# EAGLE board MGC3130_Board (EAGLE 6.3)
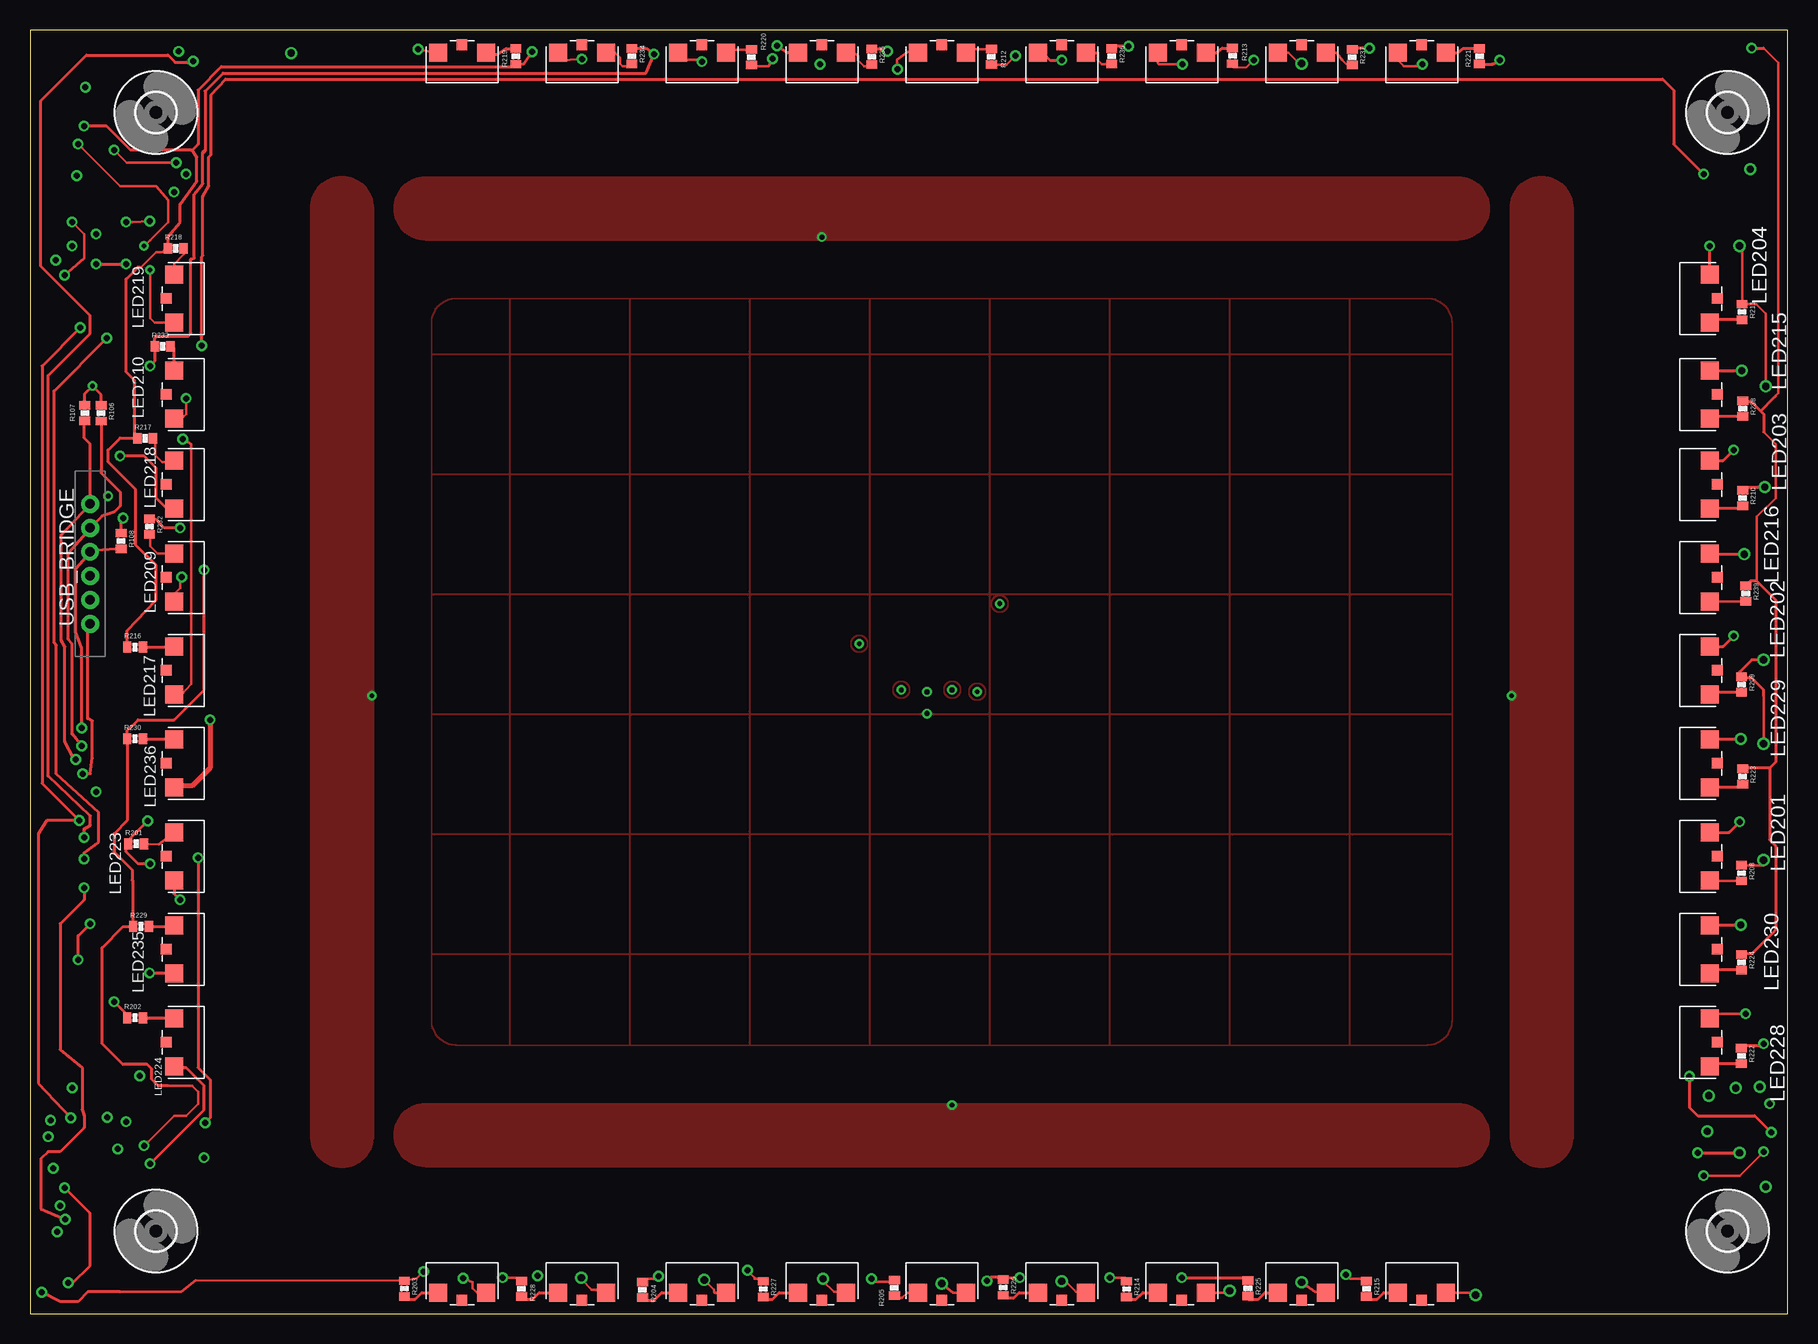
[diagram p0: board, top side]
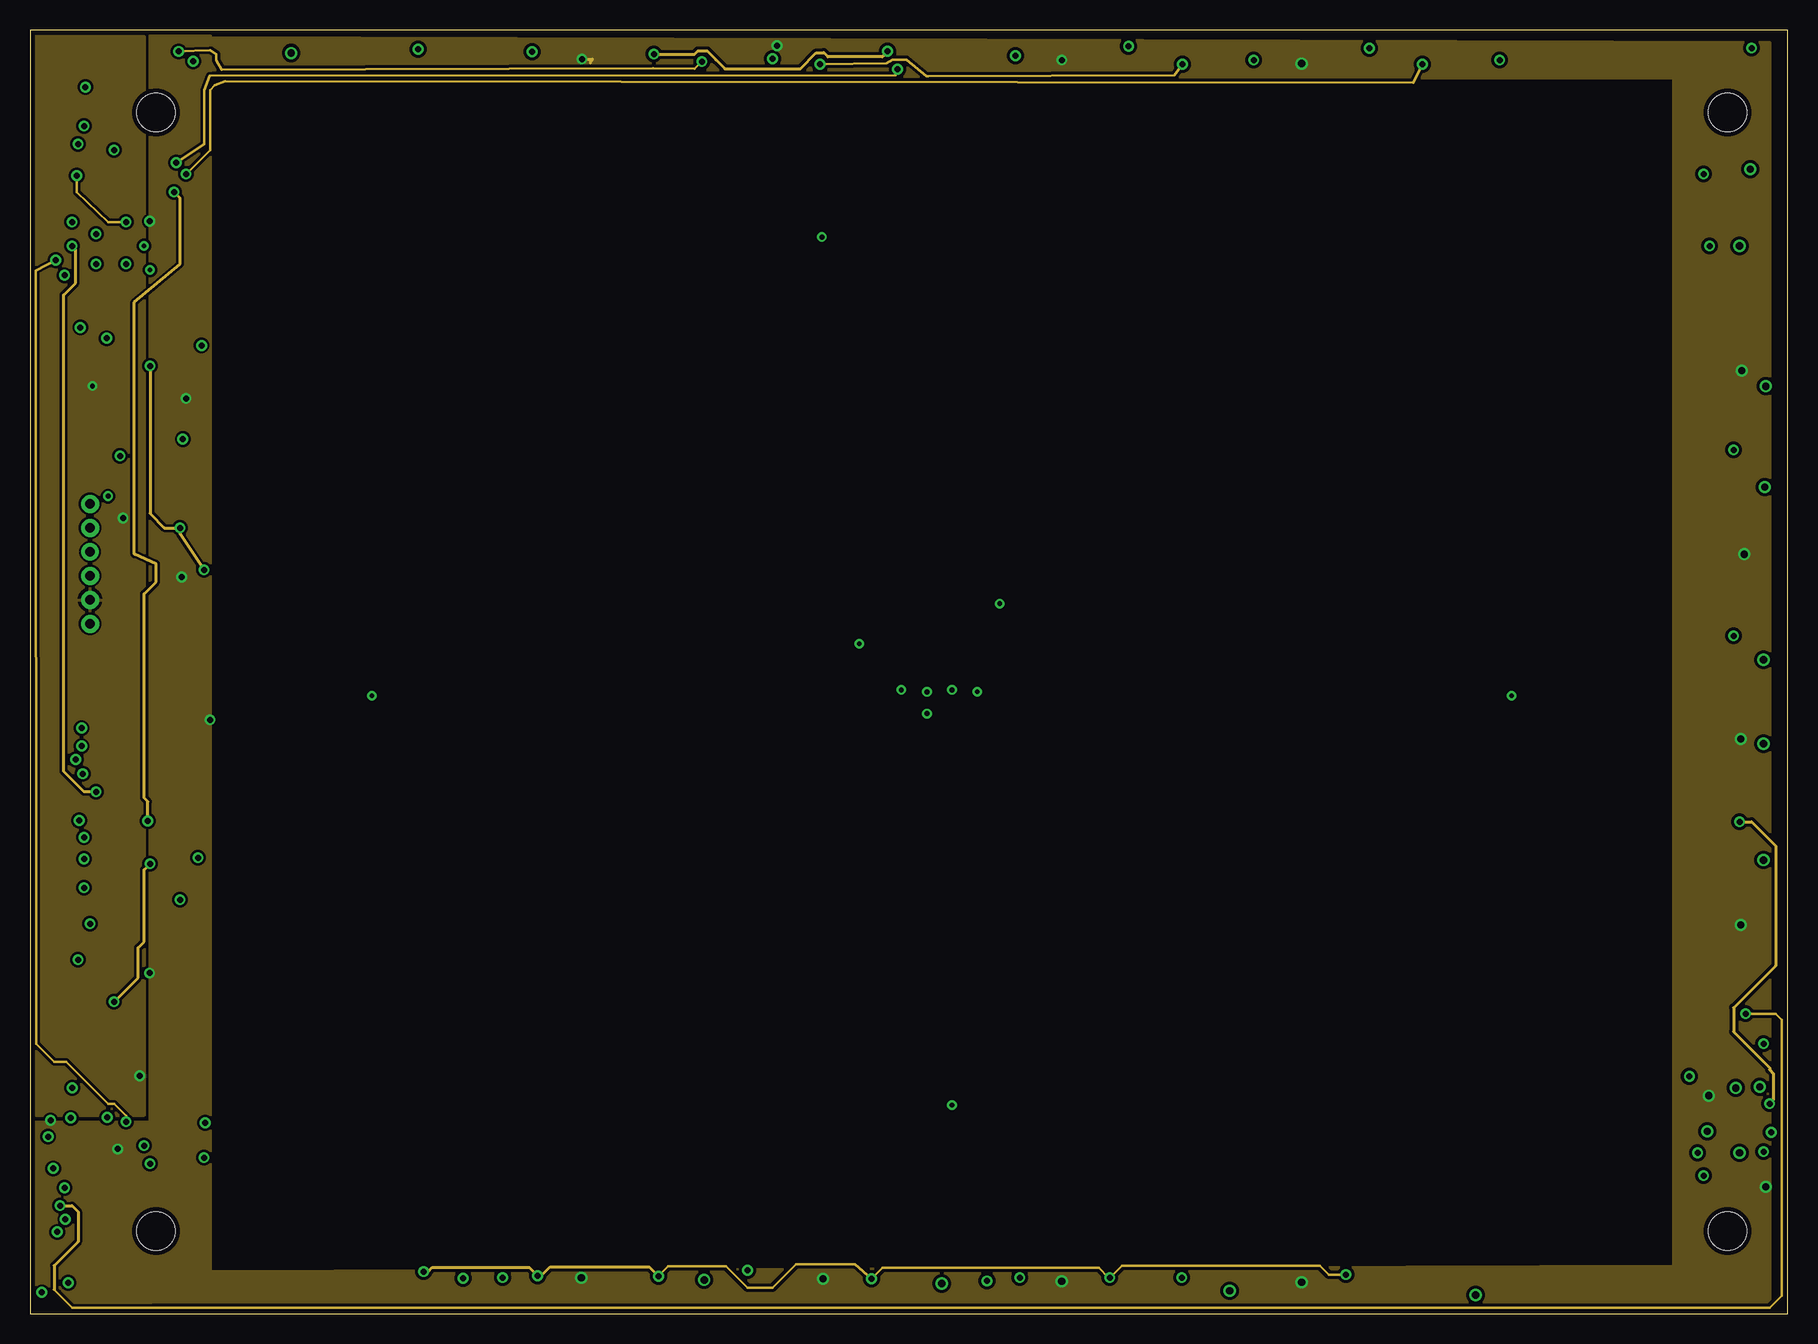
[diagram p1: board, inner layer Route2]
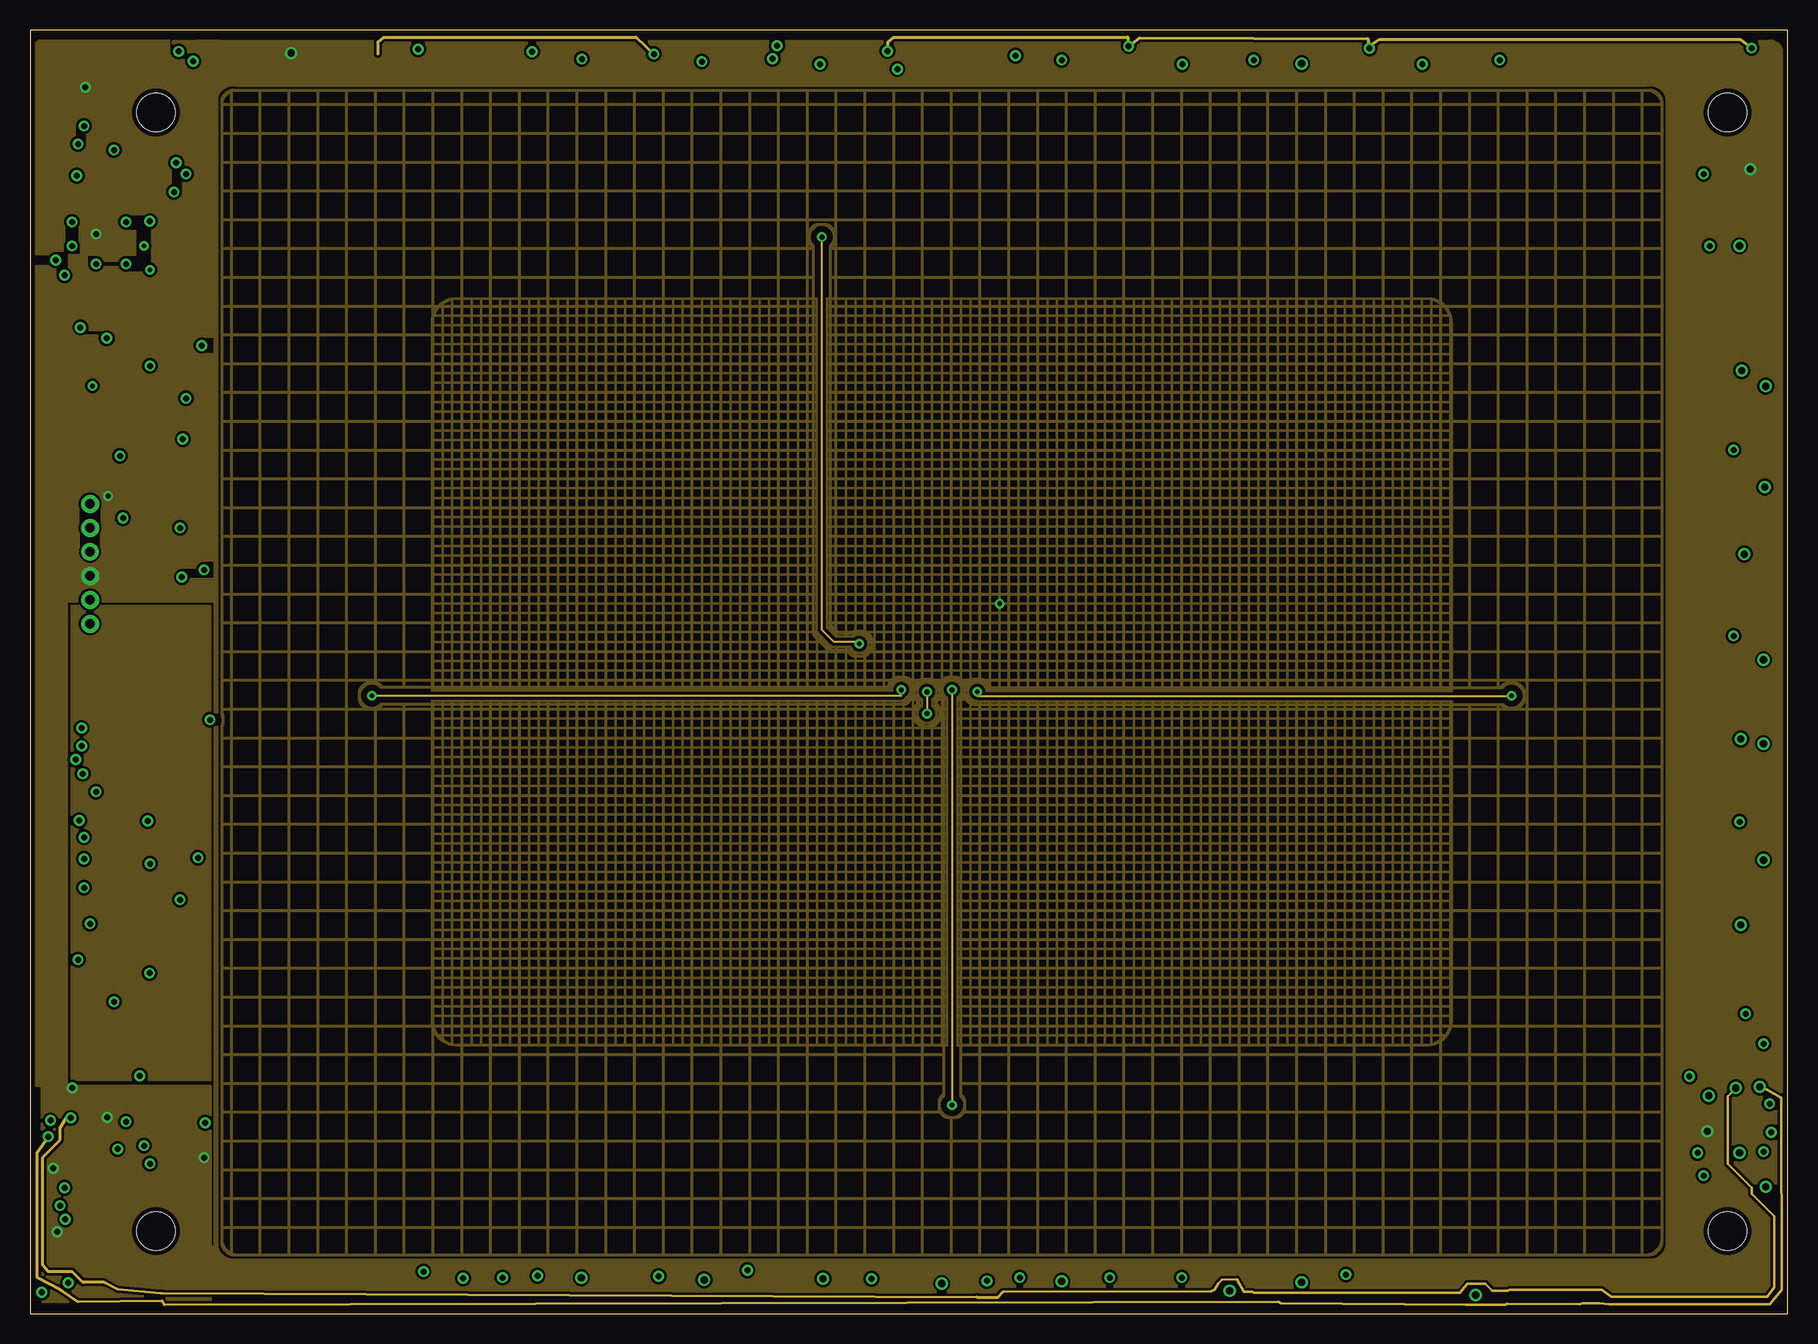
[diagram p2: board, inner layer Route15]
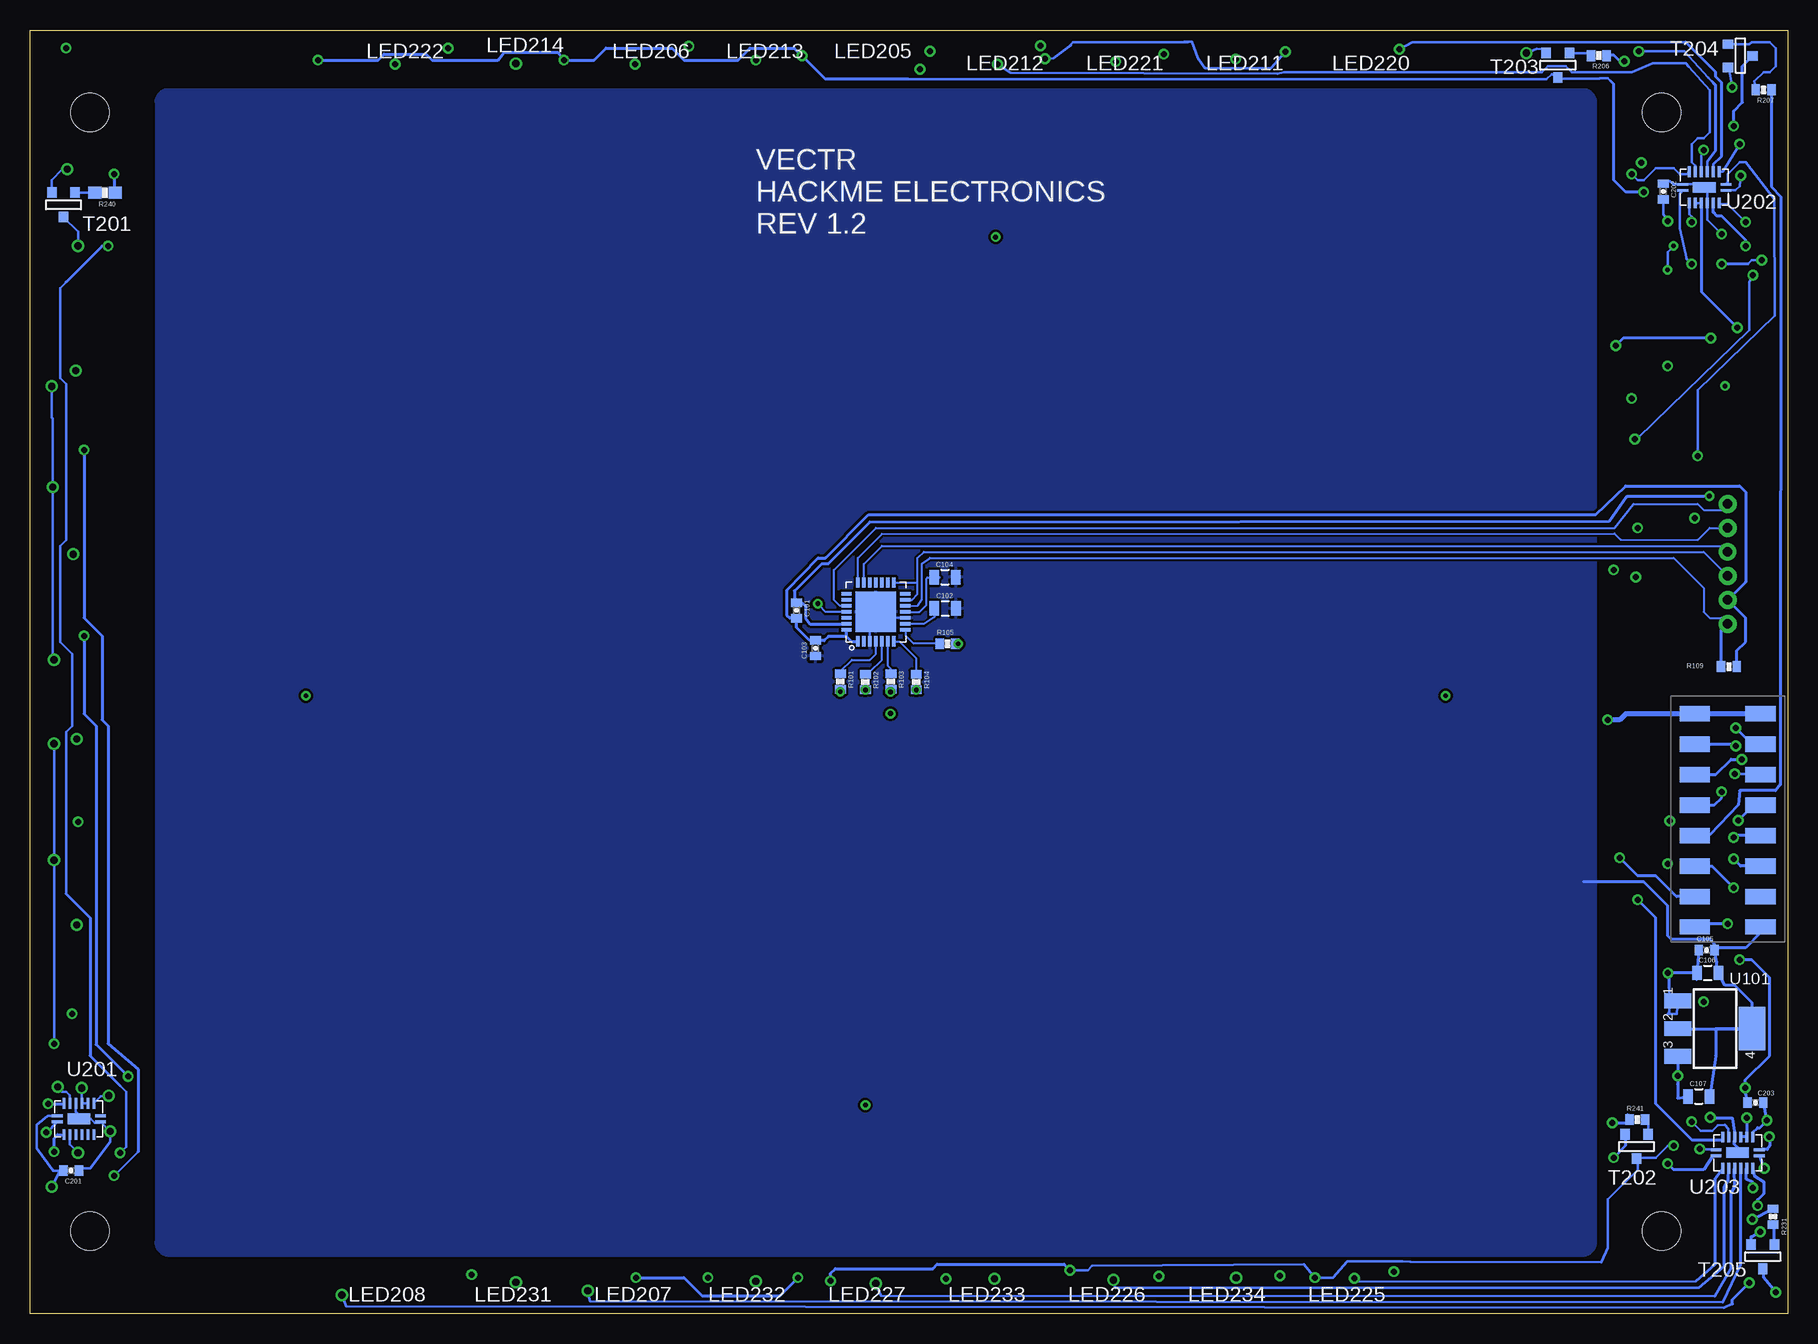
[diagram p3: board, bottom side, seen from below]

Size 146.5 x 107 mm. Coordinates in mm from the lower left corner, seen from the top.
Outline: 0,0 146.5,0 146.5,107 0,107 0,0
Copper layers (1*2+15*16): Top 0.035mm / dielectric 1.5mm / Route2 0.035mm / dielectric 1.5mm / Route15 0.035mm / dielectric 0.2mm / Bottom 0.035mm
Design rules "default *": minimum track width 0.14mm, minimum drill 12mil, track to track 8mil, track to pad 8mil, pad to pad 8mil, via to via 8mil, smd to smd 8mil, copper to edge 15mil, drill to drill 8mil, minimum pad ring 10mil, minimum via ring 8mil, stop-mask expansion 4mil, vias tented up to drill 0.45mm, thermal gap 10mil

## Footprints (pad centres in the part's own frame; a part is rotated, then mirrored left to right if it is on the bottom)
0402-CAP = smd 0.7 x 0.9: 1 -0.65,0; 2 0.65,0
0805 = smd 0.8 x 1.2: 1 -0.9,0; 2 0.9,0
APA3010 = smd 1.5 x 1.5: P$1 2,0; P$2 -2,0 | smd 0.9 x 0.9: P$3 0,0.65
0402-RES = smd 0.7 x 0.9: 1 -0.65,0; 2 0.65,0
0603-RES = smd 1.1 x 1: 1 -0.85,0; 2 0.85,0
SOT-23 = smd 0.787 x 0.889: 1 0.025,-1.016; 2 -0.94,1.016; 3 0.991,1.016
16-SMT = smd 1.27 x 2.54: P$1 0,-2.73; P$2 0,2.73; P$3 2.54,-2.73; P$4 2.54,2.73; P$5 5.08,-2.73; P$6 5.08,2.73; P$7 7.62,-2.73; P$8 7.62,2.73; P$9 10.16,-2.73; P$10 10.16,2.73; P$11 12.7,-2.73; P$12 12.7,2.73; P$13 15.24,-2.73; P$14 15.24,2.73; P$15 17.78,-2.73; P$16 17.78,2.73
SOT223 = smd 1.219 x 2.235: 1 -2.311,-3.099; 2 0,-3.099; 3 2.311,-3.099 | smd 3.6 x 2.2: 4 0,3.099
QFN28 = smd 0.85 x 0.3: P$1 -2.45,1.5; P$2 -2.45,1; P$3 -2.45,0.5; P$4 -2.45,0; P$5 -2.45,-0.5; P$6 -2.45,-1; P$7 -2.45,-1.5; P$15 2.45,-1.5; P$16 2.45,-1; P$17 2.45,-0.5; P$18 2.45,0; P$19 2.45,0.5; P$20 2.45,1; P$21 2.45,1.5 | smd 0.3 x 0.85: P$8 -1.5,-2.45; P$9 -1,-2.45; P$10 -0.5,-2.45; P$11 0,-2.45; P$12 0.5,-2.45; P$13 1,-2.45; P$14 1.5,-2.45; P$22 1.5,2.45; P$23 1,2.45; P$24 0.5,2.45; P$25 0,2.45; P$26 -0.5,2.45; P$27 -1,2.45; P$28 -1.5,2.45 | smd 3.35 x 3.35: P$29 0,0
DHVQFN16 = smd 0.9 x 0.24: 1 -1.8,-0.25; 8 1.8,-0.25; 9 1.8,0.25; 16 -1.8,0.25 | smd 0.24 x 0.9: 2 -1.25,-1.3; 3 -0.75,-1.3; 4 -0.25,-1.3; 5 0.25,-1.3; 6 0.75,-1.3; 7 1.25,-1.3; 10 1.25,1.3; 11 0.75,1.3; 12 0.25,1.3; 13 -0.25,1.3; 14 -0.75,1.3; 15 -1.25,1.3 | smd 1.9 x 0.9: PAD 0,0
3,2 = hole 3.2: 0,0
1X6_2MM_HEADER = drill 0.8 pad 1.5: 1 -5,0; 2 -3,0; 3 -1,0; 5 3,0; 6 5,0 | drill 0.8 pad 1.422: 4 1,0

## Placement (x,y rotation side)
C101  .1uF  [0402-CAP]  82.6,58.61 270 bottom
C102  4.7uF  [0805]  70.21,58.78 0 bottom
C103  .1uF  [0402-CAP]  81.03,55.46 90 bottom
C104  4.7uF  [0805]  70.23,61.38 0 bottom
C105  .1uF  [0402-CAP]  6.75,30.3 180 bottom
C106  4.7uF  [0805]  6.65,28.4 0 bottom
C107  4.7uF  [0805]  7.4,18.1 0 bottom
C201  .1uF  [0402-CAP]  143.07,11.91 180 bottom
C202  .1uF  [0402-CAP]  10.36,93.54 270 bottom
C203  .1uF  [0402-CAP]  2.67,17.58 0 bottom
LED201  APA3010QBC/D-GX  [APA3010]  140,38.12 270 top
LED202  APA3010QBC/D-GX  [APA3010]  140,53.62 270 top
LED203  APA3010QBC/D-GX  [APA3010]  140,69.12 270 top
LED204  APA3010QBC/D-GX  [APA3010]  140,84.62 270 top
LED205  APA3010QBC/D-GX  [APA3010]  76,105.12 0 top
LED206  APA3010QBC/D-GX  [APA3010]  96,105.12 0 top
LED207  APA3010QBC/D-GX  [APA3010]  96,1.75 180 top
LED208  APA3010QBC/D-GX  [APA3010]  116,1.75 180 top
LED209  APA3010SRCPRV-GX  [APA3010]  12,61.38 90 top
LED210  APA3010SRCPRV-GX  [APA3010]  12,76.62 90 top
LED211  APA3010SRCPRV-GX  [APA3010]  46,105.12 0 top
LED212  APA3010SRCPRV-GX  [APA3010]  66,105.12 0 top
LED213  APA3010SRCPRV-GX  [APA3010]  86,105.12 0 top
LED214  APA3010SRCPRV-GX  [APA3010]  106,105.12 0 top
LED215  APA3010SRCPRV-GX  [APA3010]  140,76.62 270 top
LED216  APA3010SRCPRV-GX  [APA3010]  140,61.38 270 top
LED217  APA3010QBC/D-GX  [APA3010]  12,53.62 90 top
LED218  APA3010QBC/D-GX  [APA3010]  12,69.12 90 top
LED219  APA3010QBC/D-GX  [APA3010]  12,84.62 90 top
LED220  APA3010QBC/D-GX  [APA3010]  36,105.12 0 top
LED221  APA3010QBC/D-GX  [APA3010]  56,105.12 0 top
LED222  APA3010QBC/D-GX  [APA3010]  116,105.12 0 top
LED223  APA3010QBC/D-GX  [APA3010]  12,38.12 90 top
LED224  APA3010QBC/D-GX  [APA3010]  12,22.62 90 top
LED225  APA3010QBC/D-GX  [APA3010]  36,1.75 180 top
LED226  APA3010QBC/D-GX  [APA3010]  56,1.75 180 top
LED227  APA3010QBC/D-GX  [APA3010]  76,1.75 180 top
LED228  APA3010QBC/D-GX  [APA3010]  140,22.62 270 top
LED229  APA3010SRCPRV-GX  [APA3010]  140,45.88 270 top
LED230  APA3010SRCPRV-GX  [APA3010]  140,30.38 270 top
LED231  APA3010SRCPRV-GX  [APA3010]  106,1.75 180 top
LED232  APA3010SRCPRV-GX  [APA3010]  86,1.75 180 top
LED233  APA3010SRCPRV-GX  [APA3010]  66,1.75 180 top
LED234  APA3010SRCPRV-GX  [APA3010]  46,1.75 180 top
LED235  APA3010SRCPRV-GX  [APA3010]  12,30.38 90 top
LED236  APA3010SRCPRV-GX  [APA3010]  12,45.88 90 top
R101  10k  [0402-RES]  78.95,52.68 270 bottom
R102  10k  [0402-RES]  76.86,52.64 270 bottom
R103  10k  [0402-RES]  74.74,52.68 270 bottom
R104  10k  [0402-RES]  72.62,52.64 270 bottom
R105  10k  [0402-RES]  70.01,55.84 0 bottom
R106  1.8k  [0402-RES]  5.93,75.05 270 top
R107  10k  [0402-RES]  4.57,75.07 270 top
R108  1.8k  [0402-RES]  7.6,64.41 270 top
R109  10k  [0402-RES]  4.88,53.93 180 bottom
R201  33  [0402-RES]  8.84,39.15 0 top
R202  33  [0402-RES]  8.75,24.65 0 top
R203  33  [0402-RES]  31.2,2.08 270 top
R204  33  [0402-RES]  51.05,1.99 270 top
R205  33  [0402-RES]  72.05,2.15 270 top
R206  1k  [0402-RES]  15.73,104.86 180 bottom
R207  1k  [0402-RES]  2,102.01 180 bottom
R208  33  [0402-RES]  142.66,36.71 270 top
R209  33  [0402-RES]  142.66,52.43 270 top
R210  33  [0402-RES]  142.76,67.99 270 top
R211  33  [0402-RES]  142.71,83.5 270 top
R212  33  [0402-RES]  80.14,104.76 90 top
R213  33  [0402-RES]  100.24,104.84 90 top
R214  33  [0402-RES]  91.4,2.04 270 top
R215  33  [0402-RES]  111.4,2.07 270 top
R216  33  [0402-RES]  8.75,55.56 0 top
R217  33  [0402-RES]  9.6,72.96 0 top
R218  33  [0402-RES]  12.15,88.8 0 top
R219  33  [0402-RES]  40.5,104.8 90 top
R220  33  [0402-RES]  60.14,104.72 90 top
R221  33  [0402-RES]  120.82,104.81 90 top
R222  33  [0402-RES]  142.65,21.48 270 top
R223  330  [0402-RES]  142.76,44.76 270 top
R224  330  [0402-RES]  142.66,29.28 270 top
R225  330  [0402-RES]  101.52,2.1 270 top
R226  330  [0402-RES]  81.12,2.17 270 top
R227  330  [0402-RES]  61.12,2.04 270 top
R228  330  [0402-RES]  40.97,2.06 270 top
R229  330  [0402-RES]  9.25,32.27 0 top
R230  330  [0402-RES]  8.75,47.92 0 top
R231  1k  [0402-RES]  1.21,8.08 270 bottom
R232  330  [0402-RES]  9.96,65.6 270 top
R233  330  [0402-RES]  11.05,80.62 0 top
R234  330  [0402-RES]  50.17,104.81 270 top
R235  330  [0402-RES]  70.17,104.78 270 top
R236  330  [0402-RES]  90.17,104.81 270 top
R237  330  [0402-RES]  110.22,104.72 270 top
R238  330  [0402-RES]  142.77,75.44 270 top
R239  330  [0402-RES]  143.02,60.02 270 top
R240  1k  [0603-RES]  140.24,93.42 180 bottom
R241  1k  [0402-RES]  12.51,16.17 0 bottom
T201  [SOT-23]  143.74,92.43 0 bottom
T202  [SOT-23]  12.6,13.92 0 bottom
T203  [SOT-23]  19.17,104.06 0 bottom
T204  [SOT-23]  3.93,104.82 90 bottom
T205  [SOT-23]  2.09,4.74 0 bottom
TO_MAIN  16-SMT  [16-SMT]  5,50 270 bottom
U101  MCP1755S  [SOT223]  6.05,23.75 270 bottom
U102  MGC3130  [QFN28]  76,58.5 90 bottom
U201  74HCT595BQ,115  [DHVQFN16]  142.42,16.22 0 bottom
U202  74HCT595BQ,115  [DHVQFN16]  6.93,93.88 180 bottom
U203  74HCT595BQ,115  [DHVQFN16]  4.16,13.41 0 bottom
U$1  [3,2]  10.5,100.12 0 top
U$2  [3,2]  141.5,100.12 0 top
U$3  [3,2]  141.5,6.88 0 top
U$4  [3,2]  10.5,6.88 0 top
USB_BRIDGE  1X6_2MM_HEADER  [1X6_2MM_HEADER]  5,62.5 90 top

## Library data of the parts
C101-C107 C201-C203 R101-R109 R201-R241 = SparkFun-Passives
LED201-LED236 TO_MAIN U101 U102 U201-U203 USB_BRIDGE = HackMe
T201-T205 = zetex; OC_FARNELL: unknown; OC_NEWARK: unknown
U$1-U$4 = holes

## Nets
3.3V: C101.2 C103.2 C107.1 R106.1 R107.1 R108.1 R109.1 U101.3 U102.P$1 U102.P$28 USB_BRIDGE.2
5V: C105.2 C106.1 C201.2 C202.2 C203.2 LED209.P$2 LED210.P$2 LED211.P$2 LED212.P$2 LED213.P$2 LED214.P$2 LED215.P$2 LED216.P$2 LED229.P$2 LED230.P$2 LED231.P$2 LED232.P$2 LED233.P$2 LED234.P$2 LED235.P$2 LED236.P$2 TO_MAIN.P$1 TO_MAIN.P$2 U101.1 U201.10 U201.16 U202.10 U202.16 U203.10 U203.16
AGND: C102.2 C103.1 C104.2 C105.1 C106.2 C107.2 TO_MAIN.P$16 U101.2 U101.4 U102.P$3 U102.P$10 U102.P$29
BOTTOM_RX: R102.2
CENTER_RX: R103.2
GND: C101.1 C201.1 C202.1 C203.1 T201.2 T202.2 T203.2 T204.2 T205.2 TO_MAIN.P$15 U102.P$13 U102.P$15 U102.P$27 U201.8 U201.13 U201.PAD U202.8 U202.13 U202.PAD U203.8 U203.13 U203.PAD USB_BRIDGE.3
I2C1_SCL: R106.2 TO_MAIN.P$3 U102.P$21 USB_BRIDGE.5
I2C1_SDA: R108.2 TO_MAIN.P$4 U102.P$20 USB_BRIDGE.4
LED_PWM_1: R207.1 TO_MAIN.P$9
LED_PWM_2: R206.1 TO_MAIN.P$10
LED_PWM_3: R231.1 TO_MAIN.P$11
LED_PWM_4: R240.1 TO_MAIN.P$12
LED_PWM_5: R241.1 TO_MAIN.P$13
LEFT_RX: R104.2
MGC3130_IRQ: R109.2 TO_MAIN.P$6 U102.P$12 USB_BRIDGE.1
MGC3130_RESET: R107.2 TO_MAIN.P$5 U102.P$24 USB_BRIDGE.6
N$1: LED229.P$1 R223.2
N$2: LED209.P$1 R232.2
N$3: LED230.P$1 R224.2
N$4: LED210.P$1 R233.2
N$5: LED231.P$1 R225.2
N$6: LED208.P$2 U203.6
N$8: LED211.P$1 R234.2
N$9: LED232.P$1 R226.2
N$10: LED212.P$1 R235.2
N$11: LED234.P$1 R228.2
N$12: LED233.P$1 R227.2
N$13: LED213.P$1 R236.2
N$14: LED214.P$1 R237.2
N$15: LED235.P$1 R229.2
N$16: LED215.P$1 R238.2
N$17: R207.2 T204.3
N$18: LED236.P$1 R230.2
N$19: LED216.P$1 R239.2
N$45: R101.1 U102.P$4
N$46: R102.1 U102.P$5
N$47: R103.1 U102.P$6
N$48: R104.1 U102.P$7
N$49: R105.1 U102.P$8
N$50: C102.1 U102.P$9
N$51: LED217.P$2 U202.15
N$52: C104.1 U102.P$11
N$53: LED218.P$2 U202.1
N$54: LED219.P$2 U202.2
N$55: LED220.P$2 U202.3
N$56: LED221.P$2 U202.4
N$57: LED205.P$2 U202.5
N$58: LED206.P$2 U202.6
N$59: LED222.P$2 U202.7
N$60: LED217.P$1 R216.2
N$61: LED218.P$1 R217.2
N$62: LED219.P$1 R218.2
N$63: LED220.P$1 R219.2
N$64: LED221.P$1 R220.2
N$65: LED205.P$1 R212.2
N$66: LED206.P$1 R213.2
N$67: LED222.P$1 R221.2
N$68: R216.1 R217.1 R218.1 R219.1 R220.1 T204.1
N$69: R201.1 R202.1 R212.1 R213.1 R221.1 T203.1
N$70: LED223.P$2 U203.15
N$71: LED224.P$2 U203.1
N$72: LED225.P$2 U203.2
N$73: LED226.P$2 U203.3
N$74: LED227.P$2 U203.4
N$75: LED207.P$2 U203.5
N$77: LED228.P$2 U203.7
N$78: LED223.P$1 R201.2
N$79: LED224.P$1 R202.2
N$80: LED225.P$1 R203.2
N$81: LED226.P$1 R204.2
N$82: LED227.P$1 R205.2
N$83: LED207.P$1 R214.2
N$84: LED208.P$1 R215.2
N$85: LED228.P$1 R222.2
N$87: R203.1 R204.1 R205.1 R214.1 R215.1 T205.1
N$88: LED201.P$2 U201.15
N$89: LED202.P$2 U201.1
N$90: LED203.P$2 U201.2
N$91: LED204.P$2 U201.3
N$92: R223.1 R224.1 R225.1 R226.1 R227.1 R228.1 R229.1 R230.1 R232.1 R233.1 R234.1 R235.1 R236.1 R237.1 R238.1 R239.1 T202.1
N$93: U202.9 U203.14
N$96: LED201.P$1 R208.2
N$97: LED202.P$1 R209.2
N$98: LED203.P$1 R210.2
N$99: LED204.P$1 R211.2
N$104: R208.1 R209.1 R210.1 R211.1 R222.1 T201.1
N$115: U201.14 U203.9
N$118: R206.2 T203.3
N$120: R231.2 T205.3
N$121: R240.2 T201.3
N$122: R241.2 T202.3
RIGHT_RX: R101.2
SR_CLK: TO_MAIN.P$8 U201.11 U201.12 U202.11 U202.12 U203.11 U203.12
SR_DATA: TO_MAIN.P$7 U202.14
TOP_RX: R105.2
TX: U102.P$25

## Tracks (layer width: path | path; a pad name or v marks a point on that pad's centre or on a via)
3.3V  (via drill 0.4, 0.5)
  Top 0.25: 5.93,76.13 R106.1 5.93,76.6 v5.21,77.32 4.57,76.68 R107.1 | R108.1 7.6,66.1 v7.75,66.31
  Bottom 0.15: 78.5,56.95 U102.P$28
  Bottom 0.203: v9.14,19.82 9.14,19.51 9.15,19.5
  Bottom 0.254: 9.15,19.12 9.15,17.95 C107.1 | U101.3 9.15,19.5 9.15,19.12 | 9.15,19.12 9.14,19.11 | R109.1 4.23,55.27 3.5,56 3.5,58 USB_BRIDGE.2 3.5,61 3.5,68.5 4,69 13.5,69 16,66.6 76.6,66.6 80.2,63 80.8,63 83.4,60.3 83.4,58.2 83.16,57.96 C101.2 82.6,57.2 81.51,56.11 C103.2 80.3,56.1 79.95,56.45 78.45,56.45 | U102.P$1 77.55,56 78,56 78.45,56.45 | 78.45,56.45 78.5,56.5 78.5,56.95
  pour Route2: 0.5,106.5 9.5,106.5 9.5,16.5 0.5,16.5
5V  (via drill 0.5, 0.6)
  Top 0.203: LED212.P$2 64.03,105.1 | LED214.P$2 104.03,105.1 104.9,105.1 105.8,104.2 v106,104.2 | LED234.P$2 47.75,2 46.8,2 46,2.8 v45.96,2.97 | 68.1,1.85 68.05,1.8 67,1.8 66.1,2.7 v66.1,2.9 | LED232.P$2 87.95,1.8 87.2,1.8 86.3,2.7 v86,2.7 | LED231.P$2 107.95,1.8 107.1,1.8 v106,2.6 | 44,105.4 LED211.P$2 44,104.5 v46,104.58 | v9.99,91.05 8.5,91 v8,91 | LED210.P$2 12.62,74.62 13,75 v13,76.29 v12.99,76.3 | LED209.P$2 12,60 12.5,60.5 12.5,61.23 v12.66,61.39
  Top 0.25: 64.03,105.1 63.14,105.1 v62.28,105.69 | LED213.P$2 84.38,105.12 85,104.5 v86,104.5
  Top 0.254: LED215.P$2 140.03,78.6 v142.7,78.6 | LED216.P$2 140.07,63.3 v142.9,63.3 | LED229.P$2 140.03,47.9 v142.6,47.9 | LED230.P$2 140.03,32.4 v142.6,32.4 | LED233.P$2 68.1,1.85 | v9.96,28.38 LED235.P$2
  Top 0.406: v15,49.5 15,45.5 13.5,44 12.12,44 LED236.P$2
  Route2 0.203: v3.9,94.85 3.9,93.46 6.5,91 v8,91
  Route2 0.25: v46,104.58 46.88,104.58 46.7,104.26
  Bottom 0.203: v144.7,10.57 143.91,12.1 C201.2 143.93,11.9 144.55,11.9 145.92,13.79 145.93,15.71 145.03,16.47 U201.16 | U201.10 140.59,18.1 v139.93,18.16 | 9.86,27.12 9.86,25.14 10,25 9.21,25 U101.1 | C202.2 10.36,91.64 v9.99,91.05 | v8,91 8,91.45 8.18,91.63 U202.10 | U202.16 4.37,93.63 4,94 v3.9,94.85
  Bottom 0.254: 9.85,28.4 C106.1 7.6,27.85 C105.2 | 9.85,28.4 9.91,28.48 9.92,28.39 v9.96,28.38 | 9.86,27.12 9.85,28.4 | C203.2 1.77,16.27 1.57,16.35 v1.71,16.09 2.3,15.5 2.5,15.5 2.91,15.09 U203.10 | U203.16 7.33,13.67 | 7.33,13.67 7.35,13.65 | 7.33,13.67 7.33,13.68 v7.3,13.71
  Bottom 0.406: TO_MAIN.P$2 TO_MAIN.P$1 13.5,50 14,49.5 v15,49.5
  pour Route2: 10,106.56 15,106.56 15,3 10,1.5
  pour Route2 (isolate 0.254): 14.5,106.4 145,106 145,0 3,0.5 3,3.5 137,4 137,103 15,103
  pour Route2: 0.5,16 10,16 10,0.5 0.5,0.5
AGND
  Bottom 0.15: U102.P$10 75.5,58 | 75.5,58 U102.P$29 | U102.P$3 76.5,57 75.5,58
  Bottom 0.254: U101.4 2.95,25.91 4.4,27.36 5.21,27.36 C106.2 5.75,28.55 5.89,28.69 5.89,29.29 C105.1 | U101.2 U101.4 | U101.4 5.99,23.74 6,21.5 C107.2 | TO_MAIN.P$16 2.27,31.73 3.5,30.5 5.9,30.5 C105.1 | C105.1 6.1,30.8 6.5,31.2 9.7,31.2 10,31.5 10,34 12,36 17,36
  pour Bottom: 17,102 135,102 arc-90 136,101 136,6 arc-90 135,4.88 17,4.88 arc-90 16,6 16,101 arc-90
  pour Route15 (rank 5): 3.5,60 15.6,60.04 15.44,19.5 3.5,19.5
BOTTOM_RX  (via drill 0.4)
  Route15 0.15: R102.2 v76.86,17.37
  Bottom 0.15: R102.2 76.86,51.78
  other vias: 76.86,51.99
  pour Top: 33,17.38 119,17.38 arc-180 119,12.38 33,12.38 arc-180
CENTER_RX  (via drill 0.4)
  Top 0.15: v74.77,50 v74.77,50.01
  Route15 0.15: v74.77,51.82 v74.77,50.01
  Bottom 0.15: R103.2 v74.76,51.81 v74.77,51.82
  pour Top (hatched): 35.5,84.62 116.5,84.62 arc-90 118.5,82.62 118.5,24.38 arc-90 116.5,22.38 35.5,22.38 arc-90 33.5,24.38 33.5,82.62 arc-90
GND  (via drill 0.4, 0.5, 0.6)
  Top 0.254: v4,29.5 4,31.5 v5,32.5
  Bottom 0.15: U102.P$13 73,59.5 72.53,60 72.54,60.99 | 72.54,60.99 72.54,62.99 72,63.5 7,63.5 USB_BRIDGE.3 | U102.P$15 72.55,60.95 72.54,60.99 | 82.47,59.47 C101.1 82.78,59.49
  Bottom 0.203: T203.2 20.16,105.35 20.9,105.45 v21.76,105.08 | C201.1 142.16,12.1 141.5,12.1 139.8,14.3 v139.8,15.2 139.85,15.2 U201.8 140.69,15.9 141.1,15.9 141.42,16.22 U201.PAD 142.42,16.52 142.7,16.8 142.7,17.49 U201.13 | T201.2 144.7,93.47 144.7,94.5 143.8,95.4 v143.4,95.4 | 6.01,16.28 6.36,16.28 v6.44,16.36 | v5.5,90 6.68,91.18 U202.13 6.68,93.63 U202.PAD 7.18,94.13 U202.8 9.54,94.13 9.8,94.39 C202.1 | T204.2 4.88,103.88 v4.62,102.24
  Bottom 0.25: v6.51,68.14 13.38,68.13 14.84,66.07 76.5,66 80,62.5 80.51,62.5 82.78,60.23 82.78,59.49 | 82.47,59.47 81.85,59 81.85,58 81.5,57.5 U102.P$27
  Bottom 0.254: C203.1 3.51,18.56 v3.52,18.82 3.52,19.48 1.5,21.5 1.5,28 3,29.5 v4,29.5 | 6.01,16.28 4.58,16.28 4.4,15.17 U203.13 4.43,14.11 4.18,13.86 U203.PAD | T202.2 13.54,13.96 v14.5,13 | U203.8 2.12,12.48 2.1,12.29 | 2.1,12.29 1.91,12.27 | v1.93,12.09 2.1,12.29 | T205.2 3.03,6.4 v2.28,6.8 | v5,32.5 8,32.5 8.5,32 7.95,32 TO_MAIN.P$15
  pour Route15 (rank 4): 145,106 arc-90 146,105 146,2 arc-90 145,1 12,1.5 arc-90 15.5,5.5 15.5,97.5 arc-90 12,106
  pour Route15 (rank 4): 0.5,60 3,60 3,19 0.5,19
  pour Route15 (rank 4, no thermals): 1,105.5 15.5,105.5 15.5,60 1,60
  pour Route15 (rank 4): 1,19 15,19 15,1 1,1
I2C1_SCL  (via drill 0.5)
  Top 0.25: R106.2 5.93,70.07 7.5,68.5 7.5,67.33 7,66.83 6,66.5 USB_BRIDGE.5
  Top 0.254: v4.3,47.3 3.5,48.3 3.5,55.8 3.2,56.2 3.2,63.4 USB_BRIDGE.5
  Bottom 0.15: U102.P$21 77.5,63 75.5,65 14.42,65.03 13.92,64.53 7.5,64.5 6.5,65.5 USB_BRIDGE.5
  Bottom 0.254: TO_MAIN.P$3 4.04,47.46 v4.3,47.3
I2C1_SDA  (via drill 0.5)
  Top 0.25: R108.2 5.06,63.56 USB_BRIDGE.4
  Top 0.254: v4.3,48.8 4.3,55.5 3.8,56.8 3.8,62.1 USB_BRIDGE.4
  Bottom 0.15: U102.P$20 77,62.5 75.5,64 5.5,64 USB_BRIDGE.4
  Bottom 0.254: TO_MAIN.P$4 2.96,47.46 v4.3,48.8
LED_PWM_1
  Bottom 0.254: R207.1 1.35,93.95 0.56,93.09 0.6,44.1 1,43.6 4,43.6 4.1,42.4 6.5,39.9 7.69,39.8 TO_MAIN.P$9
LED_PWM_2  (via drill 0.5)
  Top 0.254: v4.5,39.7 4.5,40.4 5.03,40.69 5.03,41.49 1.5,44.8 1.5,78.2 5,81.7 5,83.2 0.9,87.3 0.9,101.1 4.7,104.9 11.5,104.9 12.1,104.3 13.5,104.3 v13.6,104.4
  Bottom 0.254: TO_MAIN.P$10 4.36,39.84 v4.5,39.7 | v13.6,104.4 14,104.4 14.5,104.9 15.04,104.9 R206.1
LED_PWM_3  (via drill 0.5)
  Top 0.25: 0.9,12.9 0.9,8.75 v2.95,7.85
  Top 0.254: 0.9,12.9 1.5,13.5 2.5,13.5 4.5,15.5 4.5,16.5 4.35,17 4.35,20.5 2.5,22 2.5,32.5 4.5,34.5 v4.5,35.5
  Bottom 0.25: v2.95,7.85 R231.1
  Bottom 0.254: TO_MAIN.P$11 6.3,37.3 v4.5,35.5
LED_PWM_4  (via drill 0.5)
  Top 0.254: v4.5,37.9 4.5,38.4 5.72,39.29 5.72,41.79 2.2,45 2.2,55.7 2,55.9 2,76.9 v6.4,81.3 | v14.3,80.7 14.3,88.1 14.4,88.2 14.4,93.1 14.9,94 14.9,96.4 15.1,96.6 15.1,101.6 16.3,102.9 136.1,102.9 137,102 137,97.5 v139.5,95
  Bottom 0.254: TO_MAIN.P$12 3.9,37.3 v4.5,37.9 | v6.4,81.3 13.7,81.3 v14.3,80.7 | v139.5,95 139.5,93.53 R240.1
LED_PWM_5  (via drill 0.5)
  Top 0.254: v14,38 14,20.5 15,19.5 15,16.3 v14.6,15.9
  Bottom 0.254: 13.32,16.6 R241.1 13.43,15.9 v14.6,15.9 | TO_MAIN.P$13 9.26,34.76 11,36.5 12.5,36.5 v14,38
LEFT_RX  (via drill 0.4)
  Route15 0.15: v28.5,51.5 72.62,51.5 R104.2
  other vias: 72.62,51.99
  pour Top: 23.5,92.12 23.5,14.88 arc181 28.5,14.88 28.5,92.12 arc180
MGC3130_IRQ  (via drill 0.5)
  Top 0.254: v4.4,45 5.04,45.02 5.2,46.3 5.2,49.4 4.8,49.6 4.8,57.3 USB_BRIDGE.1
  Bottom 0.15: U102.P$12 72.5,59.01 72.16,59.52 72.16,62.51 71.5,63 9.5,63 7,60.5 7,58.5 6.5,58 5.5,58 USB_BRIDGE.1
  Bottom 0.254: TO_MAIN.P$6 3.02,44.92 v4.4,45 | R109.2 5.53,56.97 USB_BRIDGE.1
MGC3130_RESET  (via drill 0.5)
  Top 0.25: USB_BRIDGE.6 5,72.5 4.5,73 4.5,74.15 R107.2
  Top 0.254: v3.82,46.19 3.61,46.34 2.9,47.7 2.9,55.6 2.6,56.1 2.6,64.9 USB_BRIDGE.6
  Bottom 0.15: U102.P$24 79,59 79.5,59.5 79.5,62 76,65.5 14.4,65.48 12.82,67.5 7.5,67.5 7,67 5.5,67 USB_BRIDGE.6
  Bottom 0.254: TO_MAIN.P$5 5.98,44.92 4.7,46.2 v3.82,46.19
N$1
  Top 0.203: LED229.P$1 140.03,43.91
  Top 0.254: 140.03,43.91 142.56,43.91 R223.2
N$2
  Top 0.203: LED209.P$1 10.62,63.38 10,64 10,64.71 R232.2
N$3
  Top 0.203: LED230.P$1 140.06,28.43
  Top 0.254: R224.2 140.25,28.63 LED230.P$1
N$4
  Top 0.25: LED210.P$1 12,80.52 R233.2
N$5
  Top 0.254: R225.2 101.57,1.2 102.4,1.2 102.95,1.75 LED231.P$1
N$6  (via drill 0.5, 0.6)
  Top 0.203: v120.5,1.54 120.15,1.74 LED208.P$2
  Top 0.254: 3.19,10.17 v2.88,10.48 5,8.36 5,4 3.56,2.56 v3.19,2.56
  Bottom 0.203: 4.6,0.8 5.3,0.5 120.15,0.6 v120.5,1.54
  Bottom 0.254: 4.6,0.8 4.6,1.15 v3.19,2.56 | v2.88,10.48 2.88,10.93 3.42,11.2 U203.6
N$8
  Top 0.203: 48.02,105.1 LED211.P$1 48.77,105.12 49.2,104.7 49.2,104.2 49.4,104 50.36,104 R234.2
N$9
  Top 0.254: R226.2 81.14,1.3 82,1.3 82.45,1.75 LED232.P$1
N$10
  Top 0.203: 68.58,105.12 LED212.P$1 68.67,105.12 69,104.8 69,104.5 69.5,104 70.1,104 R235.2
N$11
  Top 0.254: R228.2 40.98,1.2 41.9,1.2 42.45,1.75 LED234.P$1
N$12
  Top 0.254: R227.2 61.13,1.2 61.9,1.2 62.45,1.75 LED233.P$1
N$13
  Top 0.2: R236.2 89.34,104.16 89,104.5 89,105.1
  Top 0.254: LED213.P$1 88.03,105.1 89,105.1
N$14
  Top 0.203: 108.03,105.1 108.9,105.1 109.4,104.5 110.03,103.87 R237.2
  Top 0.254: LED214.P$1 108.03,105.1
N$15
  Top 0.254: R229.2 11.89,32.27 LED235.P$1
N$16
  Top 0.254: R238.2 140,74.79 LED215.P$1
N$17
  Bottom 0.203: T204.3 3.19,105.81 3,106 1.5,106 1,105.5 1,104 1.5,103.5 2,103.5 2.79,102.71 R207.2
N$18
  Top 0.254: LED236.P$1 9.64,47.88 R230.2
N$19
  Top 0.203: LED216.P$1 140.01,59.36 R239.2
N$45
  Bottom 0.15: R101.1 78.95,53.55 78,54.5 76.5,54.5 76,55 U102.P$4
N$46
  Bottom 0.15: R102.1 76.51,53.49 75.5,54.5 U102.P$5
N$47
  Bottom 0.15: R103.1 74.74,53.74 75,54 U102.P$6
N$48
  Bottom 0.15: R104.1 72.62,54.62 74,56 74.45,56 U102.P$7
N$49
  Bottom 0.15: R105.1 72.84,55.84 73.5,56.5 73.5,56.95 U102.P$8
N$50
  Bottom 0.15: C102.1 71.12,58.05 72,57.5 U102.P$9
N$51  (via drill 0.5)
  Top 0.203: LED217.P$2 12.62,51.62 13.44,52.5 13.44,72.5 v12.74,72.89 | v2.88,86.55 4.5,88 4.5,90 v3.5,91
  Bottom 0.203: v12.74,72.89 12.5,73 3.2,82 3.2,86 v2.88,86.55 | v3.5,91 5,92.5 5.6,92.5 U202.15
N$52
  Bottom 0.15: U102.P$11 72.37,58.5 71.79,59.08 71.79,61.27 71.7,61.36 70.65,61.36 C104.1
N$53  (via drill 0.5)
  Top 0.203: LED218.P$2 11.38,67.12
  Top 0.25: 11.38,67.12 10.5,68 10.5,70.5 9.5,71.5 v7.5,71.5
  Bottom 0.203: v7.5,71.5 7.5,77 1.05,83.19 1.09,92.88 3.5,95.99 4,95.99 4,96 5,95 5,94.26 U202.1
N$54  (via drill 0.4, 0.5)
  Top 0.2: 10,83 v10,87 | v9.5,89 10,89.5
  Top 0.203: LED219.P$2 10.38,82.62 10,83 | 10,89.5 11.5,91 11.5,92.81 10.5,94 7.5,94 v4,97.5
  Bottom 0.2: v10,87 10,88.5 v9.5,89
  Bottom 0.203: v4,97.5 5.39,95.19 U202.2
N$55  (via drill 0.5)
  Top 0.203: v32.35,105.4 33.92,105.05 LED220.P$2
  Bottom 0.203: U202.3 6.18,95.82 | 8.5,106 12.5,106 13.01,105.97 31.26,105.97 v32.35,105.4
  Bottom 0.25: 6.18,95.82 5.5,96.5 5.5,102.61 6,103.11 6,103.5 8.5,106
N$56  (via drill 0.5)
  Top 0.2: 54.21,104.52 55.85,104.52 v56,104.37
  Top 0.203: 54.21,104.52 54.14,104.96 53.98,105.1 LED221.P$2
  Route2 0.203: v56,104.37 55.39,103.78 51.93,103.8 15.99,103.68 15.5,104.5 15.5,105 15.04,105.3 v12.39,105.21
  Bottom 0.203: U202.4 6.67,96.01 6,97 | 6.05,102.44 6.31,102.72 6.6,103.03 8.6,105.24 v12.39,105.21
  Bottom 0.25: 6,97 6,102.41 6.31,102.72
N$57  (via drill 0.5)
  Top 0.203: v72.3,103.74 72.29,104.52 73.2,105.2 73.92,105.2 LED205.P$2 | v12.18,95.94 8.06,95.94 v7,97
  Route2 0.203: v72.3,103.74 72.15,103.25 14.96,103.2 14.5,102 14.5,97.5 v12.18,95.94
  Bottom 0.203: U202.5 7.18,96.53 7,96.71 v7,97
N$58  (via drill 0.5)
  Top 0.203: v96.05,104.15 94.1,104.15 94,104.25 LED206.P$2
  Route2 0.203: v96.05,104.15 95.38,103.23 74.86,103.16 74.71,103.16 73.08,104.52 71.91,104.52 71.39,104.22 v65.85,104.16
  Bottom 0.203: v65.85,104.16 64.77,103.43 42.52,103.34 42,103.5 20.5,103.5 20,104 18.5,104 18,103.5 13,103.5 11.25,104.25 8.5,104.25 8.23,103.93 6.5,102 6.5,98.5 7,98 7.5,98 8,97.5 8,96 7.68,95.68 U202.6
N$59  (via drill 0.5)
  Top 0.2: LED222.P$2 114,104.5 114.5,104 115.92,104 v116.07,104.15
  Route2 0.203: v116.07,104.15 115.3,102.61 16.26,102.72 15.38,102.38 15,102 15,97 v13,95
  Bottom 0.203: U202.7 8.36,95 9,95 9.5,95.5 11,95.5 12,94.5 12.5,94.5 v13,95
N$60
  Top 0.254: R216.2 11.94,55.56 LED217.P$1
N$61
  Top 0.2: 10.45,71.55 10.45,72.76 R217.2
  Top 0.203: 10.45,71.55 11,71 11.88,71 LED218.P$1
N$62
  Top 0.203: LED219.P$1 12,87.5 12.8,88.3 R218.2
N$63
  Top 0.254: LED220.P$1 38.12,105 39,105 39.69,105.44 R219.2
N$64
  Top 0.203: LED221.P$1 58.24,105.37 R220.2
N$65
  Top 0.2: R212.2 78.69,105.41 78.48,105.61
  Top 0.203: LED205.P$1 78.48,105.61
N$66
  Top 0.254: LED206.P$1 98.03,105.1 98.9,105.1 99.39,105.5 R213.2
N$67
  Top 0.254: LED222.P$1 118.03,105.1 119,105.1 119.51,105.46 R221.2
N$68  (via drill 0.5)
  Top 0.2: 9,87.25 9.25,87.25 10.5,88.5 11,88.5 R218.1
  Top 0.203: R219.1 41.13,104.16 v41.85,105.2 | v61.89,104.59 61.55,103.97 60.17,103.97 R220.1
  Top 0.25: R216.1 8.12,56.95 10.5,59.5 10.5,62.39 8.81,64.08 8.81,68.69 6.5,71 6.5,72 7.5,73 8.71,73 | 8.71,73 R217.1 | R218.1 11.5,89.8 12.5,91 12.5,92.5 13.9,94.4 13.9,96.4 13.5,97 | 13.5,97 8.39,96.99 6.39,98.99 v4.5,99 | 13.5,97 14,97.5 14,102 15.95,103.95 40.3,103.95 R219.1 | 8.71,73 8.71,77.79 8,78.5 8,86.25 9,87.25
  Bottom 0.2: 49.64,106.03 50.26,106.03 50,106 59.55,106 60.02,105.53
  Bottom 0.203: 59.73,105.75 60.02,105.53 61.18,104.66 v61.89,104.59 | 49.64,106.03 49.15,104.65 48.55,103.82 43.08,103.8 v41.85,105.2
  Bottom 0.25: v4.5,99 4.5,100.23 3.76,100.97 3.76,104 T204.1
N$69  (via drill 0.5)
  Top 0.15: 100.3,103.9 101.4,103.9 v102,104.5
  Top 0.2: R212.1 81.41,104.11 v82.15,104.85
  Top 0.203: 100.3,103.9 R213.1
  Top 0.25: R202.1 7.9,25.1 v7,26 | v10,37.5 9,37.5 8,38.5 8,39.14 R201.1 7.99,39.23 v9.82,41.06 | R221.1 121.89,104.16 v122.5,104.5
  Route2 0.25: v7,26 9,28 9,30.5 9.5,31 9.5,37 v10,37.5 | v12,93.5 12.5,93 12.5,87.5 8.7,84.3 8.7,63.3 10.5,62.5 10.5,61 9.5,60 9.5,43 9.82,42.68 v9.82,41.06
  Bottom 0.203: 73.3,102.9 20.1,102.89 19.64,103.31 T203.1 18.83,102.95 15.7,102.95 15.65,103 15,103 14.75,102.75
  Bottom 0.25: v12,93.5 13.5,93.5 14.5,94.5 14.5,102.5 14.75,102.75 | 73.3,102.9 80.2,102.9 v82.15,104.85 82.8,105.5 86.5,105.5 87.5,104.5 92,104.5 93,105.5 98.5,105.5 99.5,104.5 v102,104.5 102.48,105.14 106.98,105.14 107.5,104.5 113,104.5 113.5,105 117,105 117.5,104.5 v122.5,104.5
N$70  (via drill 0.5)
  Top 0.254: LED223.P$2 12,35 v12.5,34.5
  Bottom 0.25: 8,14.5 11,17.5 11,33 v12.5,34.5
  Bottom 0.254: 8,14.5 5.39,14.5 U203.15
N$71  (via drill 0.5)
  Top 0.254: v10,12.5 14.5,17 14.5,19 13,20.5 12.12,20.5 LED224.P$2
  Bottom 0.254: U203.1 6.24,13.16 7,12 9.5,12 v10,12.5
N$72  (via drill 0.5)
  Top 0.203: v36.1,2.93 36.9,2.6 36.9,2.1 37.25,1.75 LED225.P$2
  Bottom 0.203: 6.02,4.12 7.64,2.68 35.9,2.64 35.9,2.93 v36.1,2.93
  Bottom 0.254: 6.02,4.12 6.02,11.27 U203.2
N$73  (via drill 0.6)
  Top 0.203: v56.2,2.8 57,2 57,1.8 57.05,1.75 LED226.P$2
  Bottom 0.203: 5.26,3.95 7.41,2.14 56.01,2.14 56.2,2.5 v56.2,2.8
  Bottom 0.254: 5.26,3.95 5.26,10.51 4.95,11.1 U203.3
N$74  (via drill 0.6)
  Top 0.203: v76,2.5 76.95,1.75 LED227.P$2
  Bottom 0.203: 4.67,3.82 6.05,1.45 75.55,1.5 v76,2.5
  Bottom 0.254: 4.67,3.82 4.67,10.06 4.39,10.55 4.42,12.07 U203.4
N$75  (via drill 0.6)
  Top 0.203: v100,1.9 99.85,1.75 LED207.P$2
  Bottom 0.203: 3.91,4.1 5.4,0.93 99.8,1.03 100,1.6 v100,1.9
  Bottom 0.254: 3.91,4.1 3.91,9.76 3.9,10.04 3.89,12.08 U203.5
N$77  (via drill 0.5)
  Top 0.203: v143,25 140.38,25 LED228.P$2
  Route2 0.203: v143,25 145.5,25 146,24.5 146,1.5 145,0.5 3.5,0.5 2,2
  Route2 0.25: v2.5,9 3.5,9 4,8.5 4,6 2,4 2,2
  Bottom 0.203: v2.5,9 2.5,9.5
  Bottom 0.254: U203.7 2.76,11.46 2,11 2,10 2.5,9.5
N$78
  Top 0.203: LED223.P$1 10.71,39.12 R201.2
N$79
  Top 0.254: LED224.P$1 9.62,24.62 R202.2
N$80
  Top 0.254: R203.2 31.23,1.2 32.1,1.2 32.65,1.75 LED225.P$1
N$81
  Top 0.254: R204.2 51.09,1.1 52,1.1 52.65,1.75 LED226.P$1
N$82
  Top 0.203: 71.9,1.3 72.7,1.3 73.15,1.75 LED227.P$1
  Top 0.254: R205.2 71.9,1.3
N$83
  Top 0.254: R214.2 91.41,1.2 92.2,1.2 92.75,1.75 LED207.P$1
N$84
  Top 0.254: R215.2 111.42,1.2 112.3,1.2 112.85,1.75 LED208.P$1
N$85
  Top 0.203: LED228.P$1
  Top 0.254: R222.2 140.21,20.83 LED228.P$1
N$87  (via drill 0.5)
  Top 0.2: 71.7,2.65 70.4,2.65 v70.15,2.9
  Top 0.203: R215.1 111.38,2.9 110.05,2.9 v109.7,3.25 | 91.39,2.9 R214.1 91.29,3 v90,3 | 50.99,2.9 R204.1 51.11,2.9 52.2,2.9 v52.4,3.1 | v32.8,3.5 32.23,2.93 R203.1 13.82,2.76 12.6,1.8 7.5,1.8 | 71.7,2.65 R205.1
  Top 0.254: 7.5,1.8 4.8,1.8 4,1 2.5,1 v0.99,1.76
  Route2 0.203: v52.4,3.1 52.4,3.15 53.2,3.95 58,3.95 59.8,2.15 61.9,2.15 63.85,4.1 68.75,4.1 v70.15,2.9 71.05,3.8 89.1,3.8 89.9,3 v90,3 91,4 107.5,4 108.25,3.25 v109.7,3.25
  Route2 0.25: v32.8,3.5 33.2,3.5 33.54,3.84 41.61,3.84 v42.3,3.15 42.62,3.15 43.36,3.89 51.61,3.89 v52.4,3.1
  Bottom 0.254: v0.99,1.76 2,3 2,3.66 T205.1
N$88  (via drill 0.5)
  Top 0.25: LED201.P$2 141.62,40.12 v142.5,41
  Route2 0.25: v142.5,41 143.5,41 145.5,39 145.5,29 142,25.5 142,23.5 145,20.5 145,20.34 145.31,20.03 145.31,17.81 v145,17.5
  Bottom 0.25: v145,17.5 143.69,17.5 U201.15
N$89  (via drill 0.5)
  Top 0.25: LED202.P$2 141.12,55.62 v142,56.5 | v138.33,19.76 138.33,17.17 139,16.5 143.75,16.5 v145.14,15.11
  Bottom 0.25: v142,56.5 142,50 141,49 141,22.43 v138.33,19.76 | v145.14,15.11 145.08,15.11 U201.1
N$90  (via drill 0.5)
  Top 0.2: v139.5,11.5 142.5,11.5 v144.5,13.5
  Top 0.25: LED203.P$2 141.12,71.12 v142,72
  Bottom 0.2: 137.5,13.5 v139.5,11.5
  Bottom 0.25: v142,72 142,58 140.5,56.5 140.5,49.5 140,49 140,22.5 137.48,20.35 137.5,13.5 | v144.5,13.5 144.5,14.6 144.19,14.91 U201.2
N$91  (via drill 0.5, 0.6)
  Top 0.25: LED204.P$2 v140,89 | v139,13.4 v142.5,13.4
  Bottom 0.2: 139,19 138.5,18.5 138.5,13.9 v139,13.4 | 143.5,86 144,85.5 144,78 143.5,77.5 143.5,64.5 144,64 144,56 143,55 143,49 143.5,48.5 143.5,35
  Bottom 0.203: U201.3 143.2,14.89 143.2,14.1 v142.5,13.4
  Bottom 0.25: v140,89 140.5,89 143.5,86 | 143.5,35 141.5,33 141.5,21.5 139,19
N$92  (via drill 0.5)
  Top 0.2: 145.29,76.29 145.5,76.5 145.5,76.51 145.73,76.74 145.73,104.27 144.5,105.5 | 143.94,61.06 143.94,66.44 145.5,68 145.5,72.5 144.5,73.5
  Top 0.203: v39.4,3 40.88,3 R228.1 | 80.68,3.02 R226.1 81.14,3 82,3 | R227.1 61.13,2.9 60.4,2.9 60.4,3 v59.8,3.6 | R225.1 101.15,2.95 | 11.5,19 13.5,19 14,18.5 14,17.5 13,16.5 12,16.5 v9.5,14
  Top 0.25: 11.5,19 10.67,19 10.16,19.51 10.16,20.39 9.78,20.77 7.73,20.77 6,22.5 6,30.48 7.78,32.26 8.39,32.26 R229.1 8.59,36.05 | R234.1 51.34,105.47 v52,105 | R235.1 71.36,105.42 v71.47,105.24 | v91.58,105.66 90.53,105.64 R236.1 | v111.66,105.48 110.45,105.49 R237.1 | v143.5,105.5 144.5,105.5 | 143.06,76 R238.1 | 144.5,75 144.5,73.5 | 143.94,61.06 145.5,59.5 145.5,46 145,45.5 | 145,45.5 142.87,45.5 R223.1 | 145,45.5 145,39.5 145.5,39 145.5,32 143.5,30 142.79,30 R224.1 | 80.68,3.02 80.09,3.02 v79.78,2.71 | 101.15,2.95 96.05,2.95 v96,3 | v82.5,3 82,3
  Top 0.254: 144.5,75 144.25,75.25 | 144.25,75.25 143.5,76 142.86,76 R238.1 | 145.29,76.29 144.25,75.25 | 143.94,61.06 143.41,61.06 R239.1 | v52,105 51.35,103.4 16.1,103.4 14.6,101.9 14.6,97 | 14.6,97 14.5,96.8 | 14.6,97 14.4,96.8 14.4,94.2 13.7,93.3 13.7,88 13.4,87.9 13.4,81.7 13.2,81.5 10.6,81.5 10.4,81.3 R233.1 10.4,79.4 v10,79 | 8.59,36.05 8.5,36.14 8.5,37 7,38.5 7,40 8.1,41.1 R230.1 8.1,48.6 9,49.5 12,49.5 14.5,52 v14.5,62 | v12.5,65.5 11.2,65.5 10.5,66.2 10.01,66.2 R232.1
  Route2 0.25: v71.47,105.24 71.47,104.97 71.04,104.77 66.52,104.77 66.17,105.12 66.14,105.09 65.54,105.09 64.21,103.76 57.93,103.76 57.17,104.52 57.17,104.53 56.44,105.26 55.67,105.26 55.41,105 v52,105 51.79,104.79
  Route2 0.254: v14.5,62 12.5,65 v12.5,65.5 11.2,65.5 10,66.7 v10,79
  Route15 0.25: v71.47,105.24 71.5,106 72,106.39 91.52,106.41 v91.58,105.66 91.66,105.66 92.5,106.34 111.51,106.28 v111.66,105.48 111.66,105.66 112.53,106.21 142.53,106.21 v143.5,105.5 | 29,105 29,106 29.5,106.38 50.5,106.4 v52,105
  Bottom 0.203: v59.8,3.6 58.3,3.6 58,4 40.3,4.1 v39.4,3 37.9,3 36.7,4.35 32.1,4.35 31.45,4.3 15.51,4.27 14.99,5.48 14.99,9.51 12.5,12 12.5,12.83 T202.1 12.48,13 11,13 10,14 v9.5,14
  Bottom 0.25: v79.78,2.71 79.78,3.34 79.37,3.75 71.25,3.75 70.89,4.11 60.31,4.11 v59.8,3.6 | v96,3 92,3 90.5,1.5 84,1.5 v82.5,3
N$93  (via drill 0.5)
  Top 0.25: v5.5,87.5 v8,87.5
  Route2 0.203: v8,16 8,16.5 7,17.5 6.5,17.5 3,21 2,21 0.5,22.5 0.49,86.92 v2.14,87.82
  Bottom 0.203: U203.14 4.92,15.41 5.22,15.71 5.82,15.68 6.29,15.21 7.21,15.21 v8,16 | 8.41,87.91 9,90.5 9,93.36 U202.9 | 3.31,87.48 2.97,87.82 v2.14,87.82
  Bottom 0.25: 3.31,87.48 5.48,87.48 v5.5,87.5 | v8,87.5 8.41,87.91
N$96
  Top 0.203: LED201.P$1 140.06,36.07 R208.2
N$97
  Top 0.203: LED202.P$1 140.04,51.58
  Top 0.254: R209.2 140.16,51.78 LED202.P$1
N$98
  Top 0.203: LED203.P$1 140.01,67.14
  Top 0.254: 140.01,67.14 142.56,67.14 R210.2
N$99
  Top 0.203: LED204.P$1 140.03,82.65
  Top 0.254: R211.2 140,82.85 LED204.P$1
N$104  (via drill 0.5, 0.6)
  Top 0.2: R211.1 143.91,84.15 144.7,83.36
  Top 0.203: v142.5,89 142.71,88.79 R211.1 | 144.7,83.36 v144.7,77.3 | v144.6,68.9 144.54,68.84 | 143.88,54.5 v144.5,54.5 | 144.5,51.44 v144.5,47.5 | v144.5,37.8 144.51,37.34 R208.1 | 144.33,22.33 v144.5,22.5
  Top 0.254: 144.54,68.84 142.96,68.84 R210.1 | 143.88,54.5 143.5,54.5 142.5,53.5 142.5,53.24 R209.1 142.74,53 143.5,53 144.5,52 144.5,51.44 | 144.33,22.33 142.85,22.33 R222.1
  Bottom 0.203: T201.1 142.5,90.2 v142.5,89 | v144.7,77.3 144.7,74.7 144.6,74.6 v144.6,68.9 144.6,54.6 v144.5,54.5 | v144.5,47.5 v144.5,37.8 v144.5,22.5
N$115  (via drill 0.5, 0.6)
  Route15 0.203: 2.66,1.9 3.99,0.98 11.04,1.05 11.2,0.74 104.06,0.99 104.25,0.84 119.69,0.71 123.03,0.71 123.12,0.8 129.16,0.77 129.43,0.84 130.83,0.84 131.63,0.77 145.03,0.77 146,2 145.98,17.98 144.23,18.97 v144.2,18.9
  Route15 0.254: 2.66,1.9 2.52,1.98 0.61,3 0.61,13.45 v1.51,14.75
  Bottom 0.203: v144.2,18.9 143.8,18.5 143.5,18.5 143.17,18.17 U201.14
  Bottom 0.254: v1.51,14.75 1.49,13.98 1.68,13.68 2.11,13.68 U203.9
N$118
  Bottom 0.2: T203.3 16.6,105.08 R206.2
  Bottom 0.203: R206.2 16.4,104.94
N$120
  Bottom 0.254: T205.3 1.1,7.49 R231.2
N$121
  Bottom 0.203: R240.2 141.12,93.45 T201.3
N$122
  Bottom 0.203: T202.3 11.61,16.12 R241.2
RIGHT_RX  (via drill 0.4)
  Route15 0.15: v123.5,51.5 78.96,51.5 v78.96,51.83
  Bottom 0.15: R101.2 v78.96,51.83
  pour Top: 123.5,92.12 123.5,14.88 arc181 128.5,14.88 128.5,92.12 arc180
SR_CLK  (via drill 0.5, 0.6)
  Top 0.254: v3.4,16.3 0.7,19.2 0.7,40 1.4,41.1 v4.1,41.1 1,44.2 1,79 v4.2,82.2
  Route15 0.203: 6.2,2.6 7.3,2.03 10.9,1.7 11.03,1.69 78.93,1.37 | 81.1,1.8 81.2,1.8 98.44,1.84 98.71,1.97 99.06,2.52 99.36,2.82 100.62,2.84 101.2,1.8 101.9,1.8 102,1.75 119.2,1.75 119.8,2.5 121.3,2.5 121.9,1.9 123.2,1.9 123.3,2 131,2 131.8,1.4 144.8,1.4 145.39,2.2 145.4,2.4 145.4,8.1 143.5,10 143.5,10.5 141.5,12.5 141.5,18.1 v142.2,18.8
  Route15 0.25: 78.93,1.37 80.67,1.37 81.1,1.8
  Route15 0.254: 6.2,2.6 4.4,2.6 3.5,3.5 1.5,3.5 1.07,4.02 1.07,13.02 2.5,14.5 2.5,15.5 3,16.32 3.38,16.32 v3.4,16.3
  Bottom 0.203: v142.2,18.8 142.17,18.77 U201.12 U201.11 | U202.12 U202.11
  Bottom 0.254: U203.12 U203.11 v3.4,16.3 | TO_MAIN.P$8 2.82,42.38 v4.1,41.1 | U202.12 7.18,85.18 v4.2,82.2
SR_DATA  (via drill 0.5)
  Route2 0.254: v5.5,43.5 4.5,43.5 2.8,45.2 2.8,84.9 3.8,85.9 3.8,88.7 v3.5,89
  Bottom 0.254: TO_MAIN.P$7 6.12,42.38 5.5,43 v5.5,43.5 | v3.5,89 3.5,89.5 5.5,91.5 5.9,91.5 6.2,91.8 6.2,92.56 U202.14
TOP_RX  (via drill 0.4)
  Route15 0.15: 66,89.5 66,57 67,56 69.13,56 v69.13,55.84 | 66,89.5 v66,89.74 | v66.01,89.74 66.01,89.51 66,89.5
  Bottom 0.15: R105.2 v69.13,55.84
  pour Top: 33,94.62 119,94.62 arc-180 119,89.62 33,89.62 arc-180
TX  (via drill 0.4)
  Bottom 0.15: U102.P$25 80.17,58.5 80.69,59.03 v80.84,59.18
  pour Route15 (isolate 0.5, rank 3, hatched): 17,102 135,102 arc-90 136,101 136,6 arc-90 135,4.88 17,4.88 arc-90 16,6 16,101 arc-90
  pour Route15 (isolate 0.25, no thermals, hatched): 35.5,84.62 116.5,84.62 arc-90 118.5,82.62 118.5,24.38 arc-90 116.5,22.38 35.5,22.38 arc-90 33.5,24.38 33.5,82.62 arc-90

## Text on the board
bNames: VECTR / HACKME ELECTRONICS / REV 1.2